# Altium PCB Kasli_BP_Adapter.PCBDOC (part 2 of 3)
Units mm, origin at the board's own origin, x right, y up, seen from the top; angles counter-clockwise.
Board outline 52.2 x 100 mm, 4 copper layers (TopLayer, MP(G), MidLayer1, BottomLayer), stack 1.65 mm thick; 18 components, 82 nets, 256 pads, 42 vias.
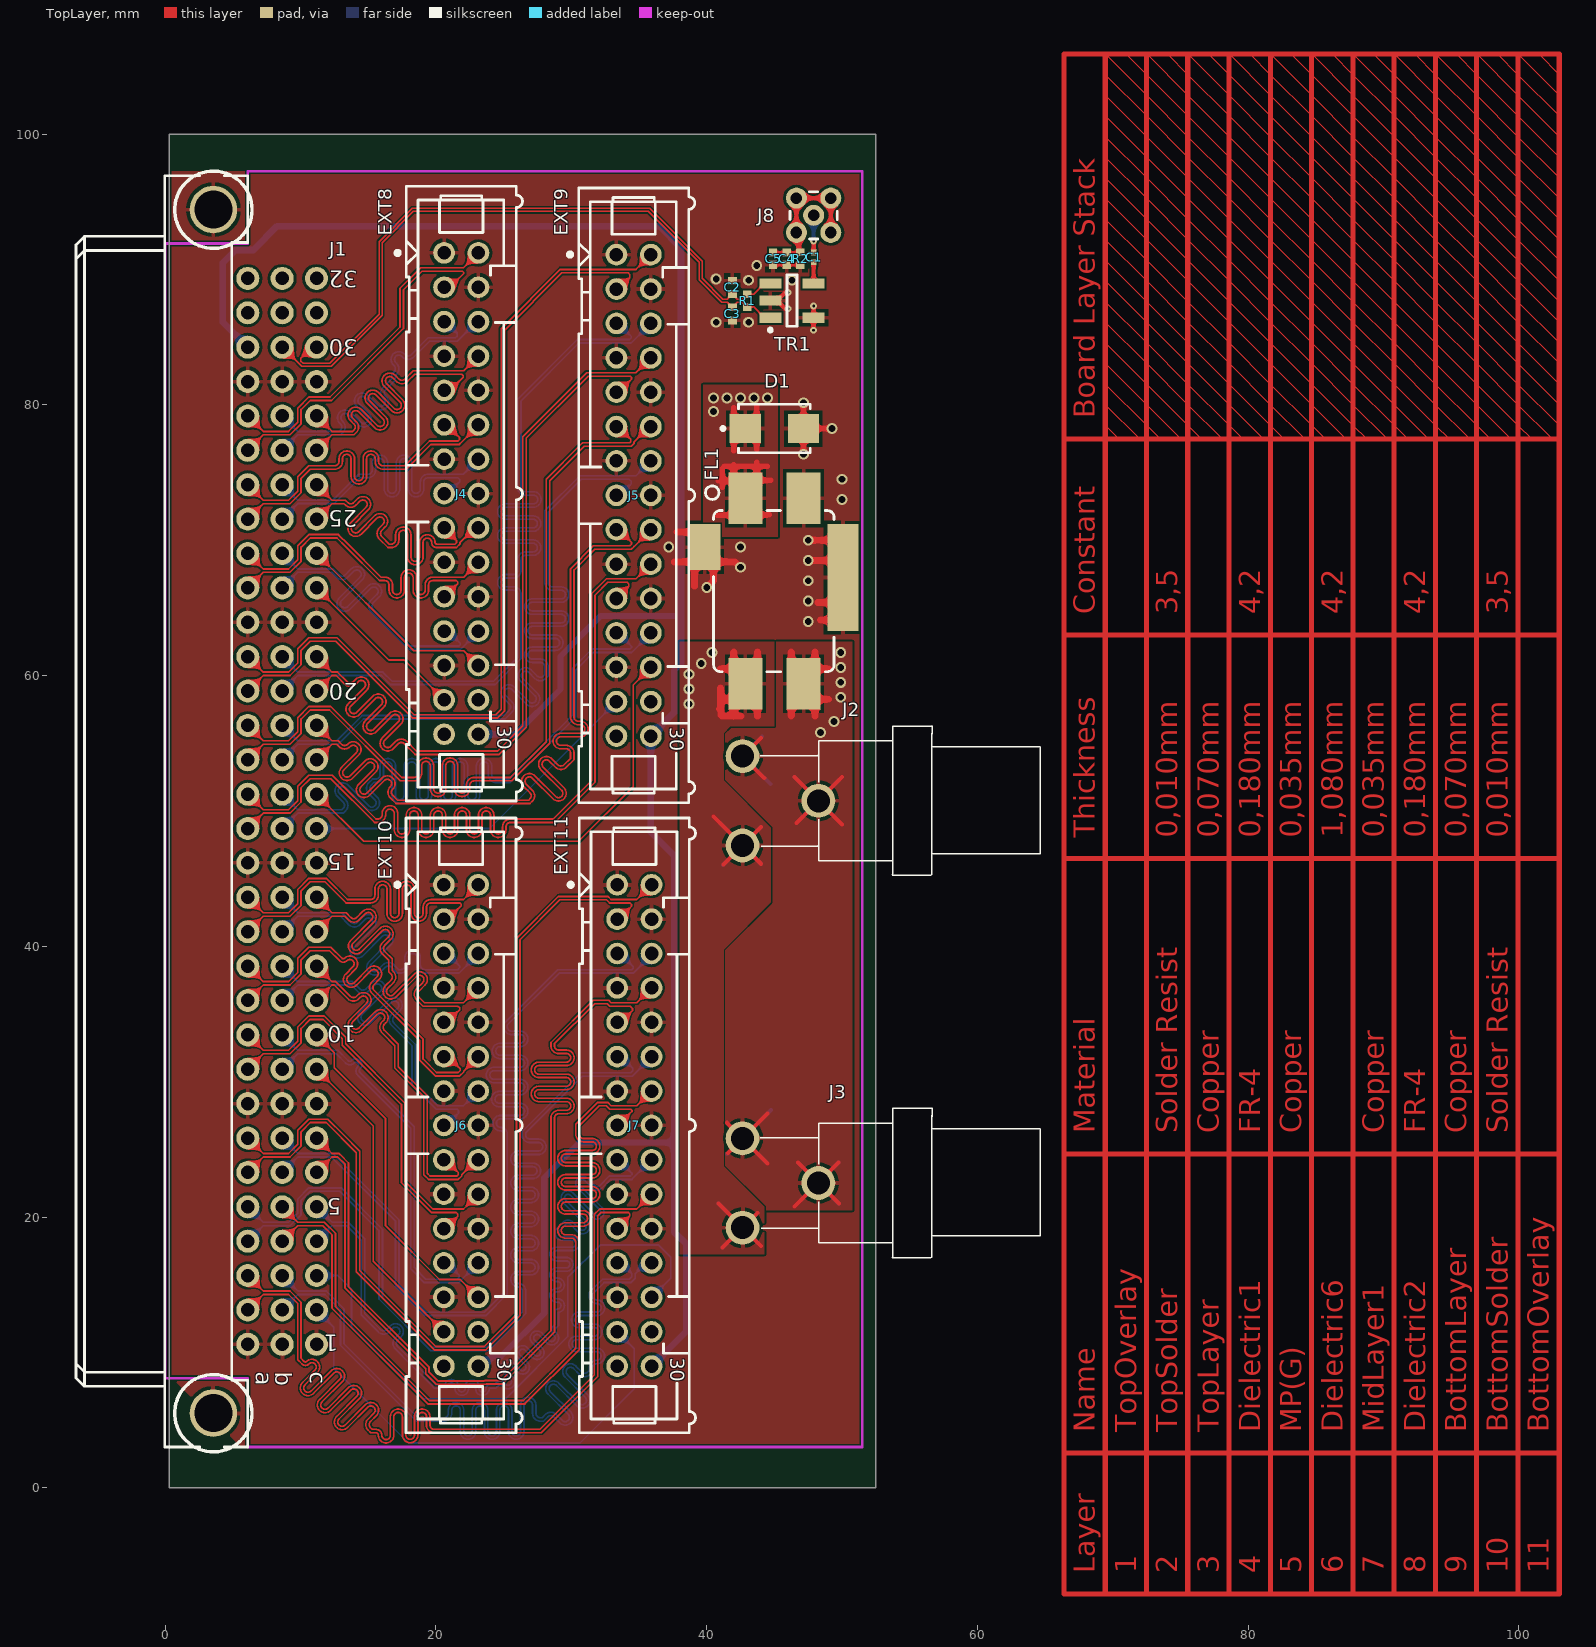
[diagram p0: TopLayer view]

## Via types
v1: diameter 0.8, hole 0.5, TopLayer to BottomLayer, tented both sides, 37 vias
v2: diameter 0.5, hole 0.2, TopLayer to BottomLayer, tented both sides, 5 vias

## Nets (pads, with @x,y where several pads share a name; then routed paths per layer and width w, separated by ;. In a path a pad name is that pad's centre, name@x,y a point inside that pad or via, vN(x,y) a via of type N, cw(c..) or ccw(c..) an arc to the next point about the centre after c; other vN are vias at no path point) (continued)
EXT9.LVDS_5_P: (continued)
  TopLayer w0.127: J1.c19@11.18,56.32 12.323,55.177 12.78,55.177 13.028,54.928 ccw(c13.253,55.153) 13.477,54.928 ; 13.49,54.941 cw(c13.894,54.537) 14.298,54.941 cw(c13.894,54.537) 14.466,54.537 cw(c13.894,54.537) 14.298,54.133 13.208,53.043 ccw(c13.433,52.818) 13.208,52.594 ccw(c13.433,52.818) 13.657,52.594 14.747,53.684 cw(c15.152,53.28) 15.556,53.684 cw(c15.152,53.28) 15.723,53.28 cw(c15.152,53.28) 15.556,52.876 14.465,51.785 ccw(c14.69,51.561) 14.465,51.336 ccw(c14.69,51.561) 14.914,51.336 16.005,52.427 cw(c16.409,52.023) 16.813,52.427 cw(c16.409,52.023) 16.98,52.023 cw(c16.409,52.023) 16.813,51.619 ; 16.8,51.606 ccw(c17.025,51.381) 16.8,51.157 17.157,50.8 26.848,50.8 26.945,50.898 ccw(c26.721,51.122) 27.038,51.122 ccw(c26.721,51.122) 26.945,51.347 26.496,51.796 cw(c26.9,52.2) 26.496,52.604 cw(c26.9,52.2) 27.305,52.604 28.831,51.077 ccw(c29.056,51.302) 29.28,51.077 ccw(c29.056,51.302) 29.373,51.302 ccw(c29.056,51.302) 29.28,51.526 27.753,53.053 cw(c28.158,53.457) 27.754,53.861 cw(c28.158,53.457) 28.562,53.861 29.011,53.412 ccw(c29.235,53.636) 29.46,53.412 29.947,53.899 29.947,54.275 ccw(c29.629,54.275) 29.629,54.592 29.221,54.592 cw(c29.221,55.164) 29.221,55.735 30.673,55.735 ccw(c30.673,56.053) 30.99,56.053 ccw(c30.673,56.053) 30.673,56.37 30.518,56.37 cw(c30.518,56.942) 29.947,56.942 29.947,67.898 31.63,69.581 34.322,69.581 34.45,69.709 34.45,69.85 J5.17@33.525,70.775
EXT9.LVDS_6_N: J1.a16 J5.21 | length 64.2
  TopLayer w0.127: J1.a16@6.1,48.7 7.243,49.843 9.217,49.843 10.036,50.662 10.036,51.711 10.707,52.382 12.236,52.382 15.469,49.149 15.712,49.149 ccw(c15.712,49.721) 16.283,49.721 16.283,49.819 cw(c16.601,49.819) 16.918,49.819 16.918,48.614 ccw(c17.49,48.614) 18.061,48.614 18.061,49.684 cw(c18.379,49.684) 18.696,49.684 18.696,48.614 ccw(c19.268,48.614) 19.839,48.614 19.839,49.684 cw(c20.157,49.684) 20.474,49.684 20.474,48.614 ccw(c21.046,48.614) 21.617,48.614 21.617,49.684 cw(c21.935,49.684) 22.252,49.684 22.252,48.614 ccw(c22.824,48.614) 23.395,48.614 23.395,49.684 cw(c23.713,49.684) 24.03,49.684 24.03,48.614 ccw(c24.602,48.614) 25.173,48.614 25.173,48.831 cw(c25.491,48.831) 25.491,49.149 26.325,49.149 28.782,49.149 31.75,52.117 31.75,65.938 32.701,66.889 34.125,66.889 34.25,66.764 34.25,66.61 J5.21@33.335,65.695
EXT9.LVDS_6_P: J1.a17 J5.20 | length 64.8
  TopLayer w0.127: J1.a17@6.1,51.24 7.243,50.097 9.112,50.097 9.782,50.767 9.782,51.816 10.602,52.636 12.341,52.636 15.574,49.403 15.712,49.403 ccw(c15.712,49.721) 16.029,49.721 16.029,49.819 cw(c16.601,49.819) 17.172,49.819 17.172,48.614 ccw(c17.49,48.614) 17.807,48.614 17.807,49.684 cw(c18.379,49.684) 18.95,49.684 18.95,48.614 ccw(c19.268,48.614) 19.585,48.614 19.585,49.684 cw(c20.157,49.684) 20.728,49.684 20.728,48.614 ccw(c21.046,48.614) 21.363,48.614 21.363,49.684 cw(c21.935,49.684) 22.506,49.684 22.506,48.614 ccw(c22.824,48.614) 23.141,48.614 23.141,49.684 cw(c23.713,49.684) 24.284,49.684 24.284,48.614 ccw(c24.602,48.614) 24.919,48.614 24.919,48.831 cw(c25.491,48.831) 25.491,49.403 26.325,49.403 28.677,49.403 31.496,52.222 31.496,66.044 32.595,67.143 34.125,67.143 34.783,67.143 J5.20@35.875,68.235
EXT9.LVDS_7_N: J1.b16 J5.24 | length 63.8
  BottomLayer w0.127: J1.b16@8.64,48.7 9.783,49.843 13.161,49.843 13.333,50.015 ccw(c12.929,50.419) 13.5,50.419 ccw(c12.929,50.419) 13.333,50.823 12.884,51.272 cw(c13.108,51.497) 12.884,51.721 cw(c13.108,51.497) 13.333,51.721 14.859,50.194 ccw(c15.263,50.599) 15.668,50.194 ccw(c15.263,50.599) 15.835,50.599 ccw(c15.263,50.599) 15.668,51.003 15.219,51.452 cw(c15.443,51.676) 15.219,51.901 15.418,52.1 15.556,52.1 ccw(c15.556,52.671) 16.127,52.671 16.127,53.306 cw(c16.445,53.306) 16.762,53.306 16.762,51.147 ccw(c17.334,51.147) 17.905,51.147 17.905,53.306 cw(c18.223,53.306) 18.54,53.306 18.54,51.147 ccw(c19.112,51.147) 19.683,51.147 19.683,53.306 cw(c20.001,53.306) 20.318,53.306 20.318,51.147 ccw(c20.89,51.147) 21.461,51.147 21.461,53.306 cw(c21.779,53.306) 22.096,53.306 22.096,51.147 ccw(c22.668,51.147) 23.239,51.147 23.239,53.306 cw(c23.557,53.306) 23.874,53.306 23.874,52.671 ccw(c24.446,52.671) 24.446,52.1 25.484,52.1 30.328,56.943 30.328,60.401 31.634,61.707 34.459,61.707 34.63,61.878 35.875,63.123 J5.24@35.875,63.155

## Text inside footprints (layer, text, board x,y; h text height)
J1: TopOverlay "5" at 12.995,21.385 h1.2 r180; TopOverlay "1" at 12.795,11.325 h1.2 r180; TopOverlay "30" at 14.22,84.835 h1.2 r180; TopOverlay "10" at 14.12,34.135 h1.2 r180; TopOverlay "32" at 14.22,89.915 h1.2 r180; TopOverlay "25" at 14.2,72.2 h1.2 r180; TopOverlay "c" at 10.68,8.56 h1.2 r270; TopOverlay "b" at 8.14,8.56 h1.2 r270; TopOverlay "a" at 6.7,8.56 h1.2 r270; TopOverlay "15" at 14.12,46.835 h1.2 r180; TopOverlay "20" at 14.22,59.435 h1.2 r180; Mechanical14 "5" at 12.995,21.385 h1.2 r180; Mechanical14 "10" at 14.12,34.135 h1.2 r180; Mechanical14 "25" at 14.2,72.2 h1.2 r180; Mechanical14 "1" at 12.795,11.325 h1.2 r180; Mechanical14 "32" at 14.22,89.915 h1.2 r180; Mechanical14 "15" at 14.12,46.835 h1.2 r180; Mechanical14 "20" at 14.22,59.435 h1.2 r180; Mechanical14 "30" at 14.22,84.835 h1.2 r180; Mechanical14 "c" at 10.68,8.56 h1.2 r270; Mechanical14 "b" at 8.14,8.56 h1.2 r270; Mechanical14 "a" at 6.7,8.56 h1.2 r270
J4: TopOverlay "30" at 24.537,56.3 h1.02 r270; Mechanical14 "30" at 24.537,56.3 h1.02 r270
J5: TopOverlay "30" at 37.272,56.17 h1.02 r270; Mechanical14 "30" at 37.272,56.17 h1.02 r270
J6: TopOverlay "30" at 24.522,9.625 h1.02 r270; Mechanical14 "30" at 24.522,9.625 h1.02 r270
J7: TopOverlay "30" at 37.322,9.625 h1.02 r270; Mechanical14 "30" at 37.322,9.625 h1.02 r270